# Altium PCB IMU sheild.PcbDoc
Units mm, origin at the board's own origin, x right, y up, seen from the top; angles counter-clockwise.
Board outline 50 x 80 mm, 2 copper layers (Top Layer, Bottom Layer); 10 components, 17 nets, 55 pads, 20 vias.
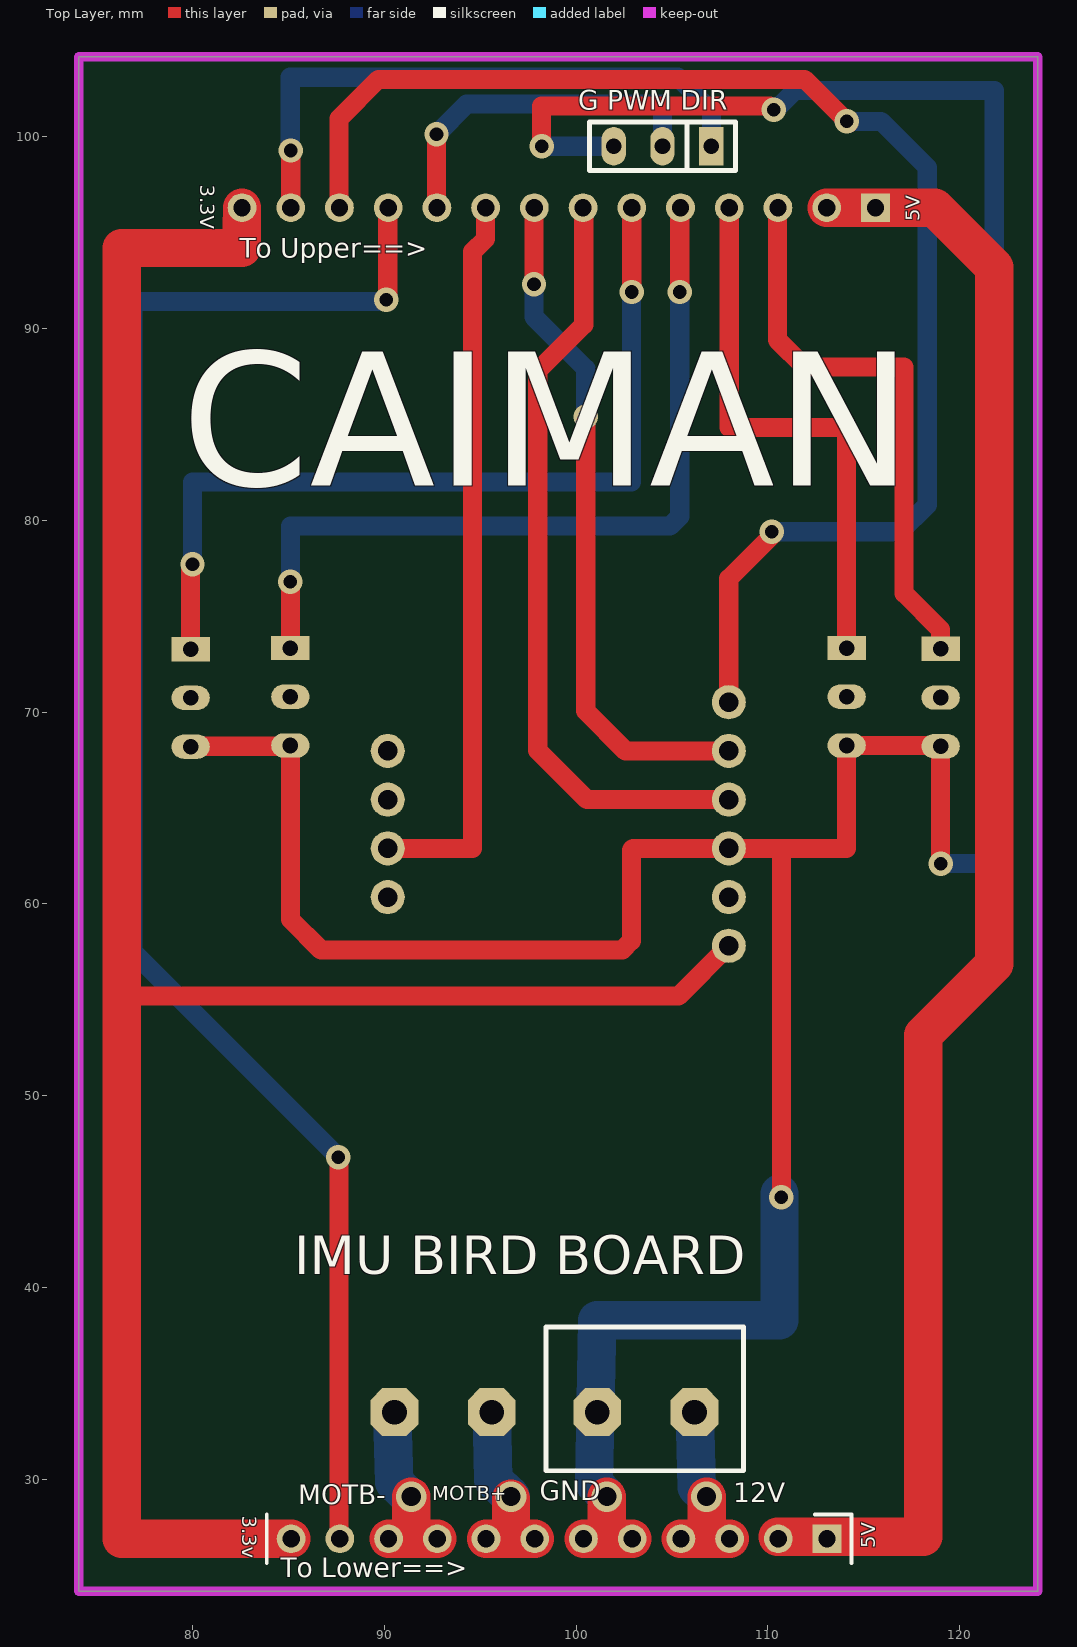
[diagram p0: Top Layer view]
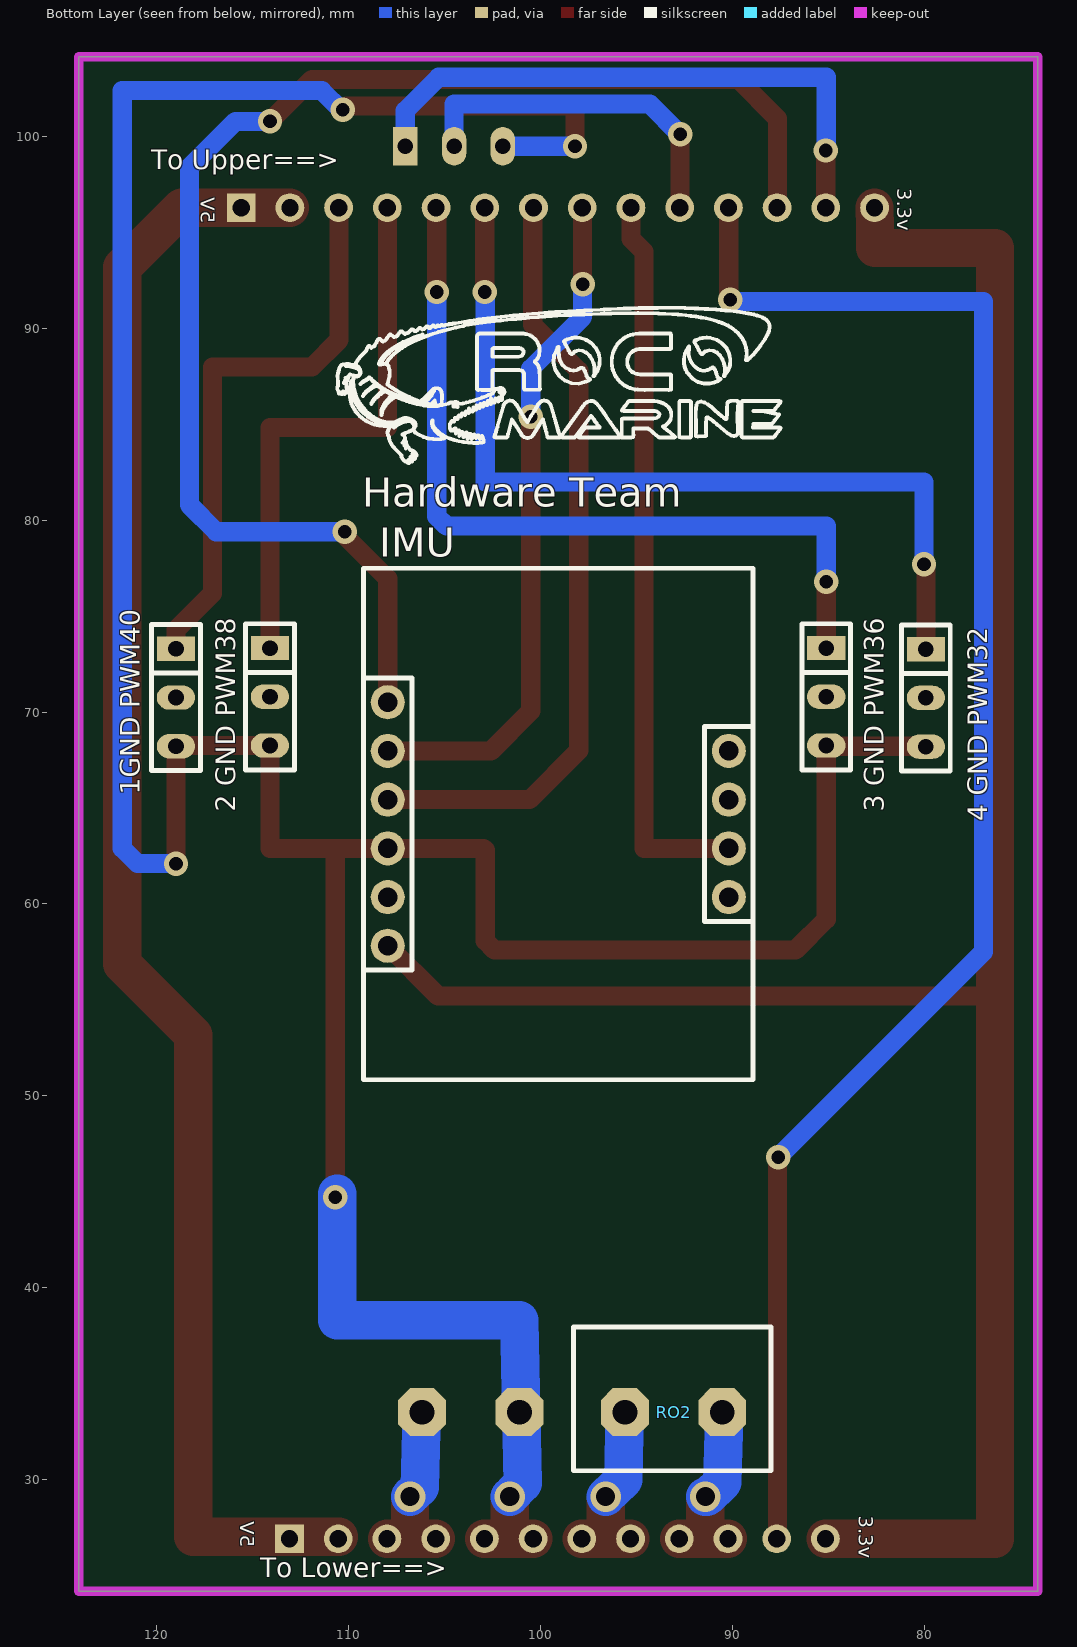
[diagram p1: Bottom Layer view, seen from below]

## Layer stack, top to bottom
Top Solder: solder mask 0.0102, Solder Resist, Dk 3.5
Top Layer: signal copper 0.0356
Dielectric 1: dielectric 0.32, FR-4, Dk 4.8
Bottom Layer: signal copper 0.0356
Bottom Solder: solder mask 0.0102, Solder Resist, Dk 3.5

## Board outline
74.068,104.167 124.068,104.167 124.068,24.167 74.068,24.167

## Design rules (kind name [scope] priority, off if disabled: settings)
Clearance [All] p1: gap=0.254 ignorepadtopadclearanceinfootprint=FALSE except(0: Arc-Hole Track-Hole SMDPad-Hole THPad-Hole Via-Hole Fill-Hole Poly-Hole Region-Hole Text-Hole)
PolygonConnect [All] p1: connectstyle=Relief reliefconductorwidth=0.254 reliefentries=4 polygonreliefangle="90 Angle" airgapwidth=0.254
RoutingVias [All] p1: holewidth=0.711 width=1.27 viastyle="Through Hole" minholewidth=0.711 minwidth=1.27 maxholewidth=0.711 maxwidth=1.27
SolderMaskExpansion [All] p1: expansion=0.102
Width [All] p1: maxlimit=2 minlimit=1 preferedwidth=1.5
30 further rules are at their usual default settings.

## Classes and differential pairs
component class "IMU sheild": "1GND PWM40" "2 GND PWM38" "3 GND PWM36" 3.3V 3.3v "4 GND PWM32" "G PWM DIR" IMU

## Components (designator, comment, footprint, x,y, rotation, side; value= is the part's Value field where it differs from the comment)
"1GND PWM40" "motor1" SIP3 119,73.3 r270 bottom (schematic designator M1)
"2 GND PWM38" "motor2" SIP3 114.1,73.34 r270 bottom (schematic designator M2)
"3 GND PWM36" "motor3" SIP3 85.1,73.34 r270 bottom (schematic designator M3)
3.3v "power interface" HDR1X12 113.08,26.9 r180 top (schematic designator P)
3.3V "signal interface" HDR1X14 115.6,96.3 r180 top (schematic designator S)
"4 GND PWM32" "motor4" SIP3 79.9,73.28 r270 bottom (schematic designator M4)
"G PWM DIR" "HEADER 3" SIP3 107.04,99.5 r180 top (schematic designator JP1)
IMU "IMU BNO055" bno055 107.958,70.517 r180 bottom
RO1 "Rossetta" "Rossetta 2-pin" 101.1,33.5 r180 top
RO2 "Rossetta" "Rossetta 2-pin" 95.6,33.5 r0 bottom

## Footprints (in the part's own frame and the unit in brackets; to place one, negate y for a bottom-side part, rotate by r counter-clockwise, add the part's x,y. Pads: shape width x height; smd on the part's side, far side on the other; paste and mask are expansions set on the pad)
bno055 [mil]
  round 70 hole 40: 3vo(0,-400) ADR(700,-100) GND(0,-300) INT(700,-200) PS0(700,-400) PS1(700,-300) RST(0,0) SCL(0,-100) SDA(0,-200) Vin(0,-500)
  silkscreen extent -50,-775 750,275, body extent -50,-775 750,275, height 240
HDR1X12 [mm] "Connector; Header; 12 Position"
  rect 1.5x1.5 hole 0.9: 1(0,0)
  round 1.5 hole 0.9: 2(2.54,0) 3(5.08,0) 4(7.62,0) 5(10.16,0) 6(12.7,0) 7(15.24,0) 8(17.78,0) 9(20.32,0) 10(22.86,0) 11(25.4,0) 12(27.94,0)
  silkscreen extent -1.27,-1.27 29.21,1.27
HDR1X14 [mm] "Connector; Header; 14 Position"
  rect 1.5x1.5 hole 0.9: 1(0,0)
  round 1.5 hole 0.9: 2(2.54,0) 3(5.08,0) 4(7.62,0) 5(10.16,0) 6(12.7,0) 7(15.24,0) 8(17.78,0) 9(20.32,0) 10(22.86,0) 11(25.4,0) 12(27.94,0) 13(30.48,0) 14(33.02,0)
"Rossetta 2-pin" [mm]
  oct 2.5x2.5 hole 1.3: 1(0,0) 2(-5.08,0)
  silkscreen extent -7.62,-4.45 2.67,3.05, body extent -7.62,-3.43 2.54,4.07, height 10
SIP3 [mm]
  rect 1.27x2 hole 0.813: 1(0,0)
  oval 1.27x2 hole 0.813: 2(2.54,0) 3(5.08,0)
  silkscreen extent -1.27,-1.27 6.35,1.27

## Part data
"1GND PWM40" "2 GND PWM38" "3 GND PWM36" "4 GND PWM32": library part "HEADER 3"
3.3v: library part "Header 12", "Header, 12-Pin"
3.3V: library part "Header 14", "Header, 14-Pin"

## Via types
v1: diameter 1.27, hole 0.711, Top Layer to Bottom Layer, 16 vias
v2: diameter 1.6, hole 1, Top Layer to Bottom Layer, 4 vias

## Nets (pads, with @x,y where several pads share a name; then routed paths per layer and width w, separated by ;. In a path a pad name is that pad's centre, name@x,y a point inside that pad or via, vN(x,y) a via of type N, cw(c..) or ccw(c..) an arc to the next point about the centre after c; other vN are vias at no path point)
3.3V: 3.3v.12 3.3V.14 IMU.Vin | length 117
  Top Layer w1: 76.3,55.2 105.341,55.2 IMU.Vin
  Top Layer w2: 76.3,55.2 76.3,26.9 3.3v.12 ; 76.3,55.4 76.3,94.2 82.558,94.2 82.558,95.3 3.3V.14
5V: 3.3v.1 3.3V.1 3.3V.2 3.3v.2 | length 85.4
  Top Layer w2: 3.3v.2@110.498,27 118.1,27 118.1,53.166 121.8,56.866 121.8,93.2 118.7,96.3 3.3V.2
12V: 3.3v.3 3.3v.4 RO1.2 | length 9.4
  Top Layer w2: 3.3v.4 106.8,26.9 ; v2(106.8,29.1) 106.8,26.9 ; 3.3v.3 106.8,26.9
  Bottom Layer w2: RO1.2 106.292,29.58 v2(106.8,29.1)
CDIRECTION: 3.3V.13 "G PWM DIR.1" | length 31.4
  Top Layer w1: 3.3V.13 v1(85.12,99.28)
  Bottom Layer w1: v1@85.098,99.2 85.098,103.1 105.3,103.1 107.05,101.35 107.04,99.5
CPWM: 3.3V.10 "G PWM DIR.2" | length 18.5
  Top Layer w1: 3.3V.10@92.718,96.3 v1(92.718,100.118)
  Bottom Layer w1: v1(92.718,100.118) 94.3,101.7 104.5,101.7 104.5,99.5
GND: 3.3v.5 3.3v.6 "1GND PWM40.3" "2 GND PWM38.3" "3 GND PWM36.3" "4 GND PWM32.3" "G PWM DIR.3" IMU.GND RO1.1 | length 186.2
  Top Layer w1: 80,68.22 85.1,68.22 85.1,59.2 86.7,57.6 102.4,57.6 102.878,58.078 102.878,62.816 102.959,62.897 IMU.GND 110.7,62.897 ; v1(98.2,99.5) 98.2,101.6 110.1,101.6 v1(110.3,101.4) ; v1(110.7,44.7) 110.7,62.897 ; v1(119,62.1) 119,68.22 118.96,68.26 114.1,68.26 114.097,68.257 114.097,62.897 110.7,62.897
  Top Layer w2: 3.3v.6 101.6,26.9 ; v2(101.6,29.1) 101.6,26.9 ; 3.3v.5 101.6,26.9
  Bottom Layer w1: v1(98.2,99.5) 101.96,99.5 ; v1(110.3,101.4) 110.4,101.4 111.4,102.4 121.8,102.4 121.8,62.9 121,62.1 v1(119,62.1)
  Bottom Layer w2: v2(101.6,29.1) 100.927,29.801 101.1,38.3 110.6,38.3 v1@110.6,44.9
GRIPPER+: 3.3v.9 3.3v.10 RO2.2 | length 9.4
  Top Layer w2: 3.3v.10 91.4,26.9 ; v2(91.4,29.1) 91.4,26.9 ; 3.3v.9 91.4,26.9
  Bottom Layer w2: RO2.2@90.42,33.3 90.517,29.84 91.312,29.089 v2@91.4,29.092
GRIPPER-: 3.3v.7 3.3v.8 RO2.1 | length 9.4
  Top Layer w2: 3.3v.8 96.6,26.9 ; v2@96.6,29 96.6,26.9 ; 3.3v.7 96.6,26.9
  Bottom Layer w2: RO2.1 95.686,29.97 v2(96.6,29.1)
PS1: 3.3V.9 IMU.PS1 | length 38.1
  Top Layer w1: IMU.PS1 94.6,62.897 94.6,94 95.28,94.68 3.3V.9
PWM1: 3.3V.3 "1GND PWM40.1" | length 29.6
  Top Layer w1: 110.498,92 110.498,89.402 111.9,88 117.1,88 117.1,76.2 119,74.3 119,73.3 ; 110.5,92 110.5,96.28 3.3V.3
PWM2: 3.3V.4 "2 GND PWM38.1" | length 29.1
  Top Layer w1: 3.3V.4 107.98,84.842 114.1,84.842 114.1,73.3
PWM3: 3.3V.5 "3 GND PWM36.1" | length 43
  Top Layer w1: 85.1,73.34 v1(85.1,76.8) ; v1(105.4,91.9) 105.4,96.26 3.3V.5
  Bottom Layer w1: v1(85.1,76.8) 85.1,79.7 104.9,79.7 105.4,80.2 v1(105.4,91.9)
PWM4: 3.3V.6 "4 GND PWM32.1" | length 45.9
  Top Layer w1: 79.9,73.28 79.9,77.6 v1(80,77.7) ; v1(102.9,91.9) 3.3V.6
  Bottom Layer w1: v1(80,77.7) 80,82 102.878,82 v1@102.878,91.9
REST: 3.3V.12 IMU.RST | length 74.3
  Top Layer w1: 3.3V.12@87.638,96.3 87.638,100.938 89.689,102.989 111.911,102.989 v1(114.1,100.8) v1@114.2,100.7 ; IMU.RST 107.958,76.958 110.2,79.2 v1(110.2,79.4)
  Bottom Layer w1: v1(110.2,79.4) 116.9,79.4 118.3,80.8 118.3,98.4 115.9,100.8 v1(114.1,100.8)
SCL: 3.3V.8 IMU.SCL | length 35.7
  Top Layer w1: v1(97.8,92.3) 97.8,96.28 3.3V.8 ; v1(100.5,85.4) 100.5,70.054 102.577,67.977 IMU.SCL
  Bottom Layer w1: v1@97.798,92.3 97.798,90.602 100.5,87.9 v1(100.5,85.4)
SDA: 3.3V.7 IMU.SDA | length 40.3
  Top Layer w1: 3.3V.7@100.4,96.3 100.4,90.2 98,87.8 98,68 100.563,65.437 IMU.SDA
SERVO: 3.3V.11 3.3v.11 | length 87.1
  Top Layer w1: 3.3v.11@87.638,26.9 v1@87.638,46.762 ; v1@90.178,91.4 3.3V.11@90.178,96.3
  Bottom Layer w1: v1@87.638,46.762 76.9,57.5 76.9,91.4 v1@90.178,91.4
  other v1: 87.6,46.8 90.1,91.5
pads on no net: "1GND PWM40.2" "2 GND PWM38.2" "3 GND PWM36.2" "4 GND PWM32.2" IMU.3vo IMU.ADR IMU.INT IMU.PS0

## Keep-outs
Keep-Out Layer:
  the board outline again, w0.5

## Silkscreen, mask and mechanical layers (free items; w line width, h text height)
Top Overlay:
  text "5V" at 117.9,95.6 h0.75 r90
  text "To Upper==>" at 82.454,93.687 h1
  text "CAIMAN" at 79.4,81.8 h7
  text "IMU BIRD BOARD" at 85.3,40.7 h2
  text "MOTB+" at 92.5,28.9 h0.75
  text "GND" at 98.1,28.9 h1
  text "12V" at 108.2,28.8 h1
  text "MOTB-" at 85.5,28.7 h1
  text "5V" at 115.6,26.4 h0.75 r90
  text "To Lower==>" at 84.6,24.9 h1
Bottom Overlay:
  drawing of 1936 lines, arcs and shapes, not listed
  text "To Upper==>" at 120.3,98.3 h1
  text "3.3v" at 81.4,97.3 h0.75 r90
  text "5V" at 117.7,95.5 h0.75 r90
  text "Hardware Team" at 109.289,80.719 h1.52
  text "3.3v" at 83.41,28.11 h0.75 r90
  text "5V" at 115.646,26.454 h0.75 r90
  text "To Lower==>" at 114.6,24.9 h1